# Altium PCB UNReLo End Node PCB.PcbDoc (part 2 of 2)
Units mm, origin at the board's own origin, x right, y up, seen from the top; angles counter-clockwise.
Board outline 54 x 59 mm, 4 copper layers (Top Layer, GND, 3v3 PWR, Bottom Layer), stack 1.586 mm thick; 54 components, 49 nets, 237 pads, 64 vias.
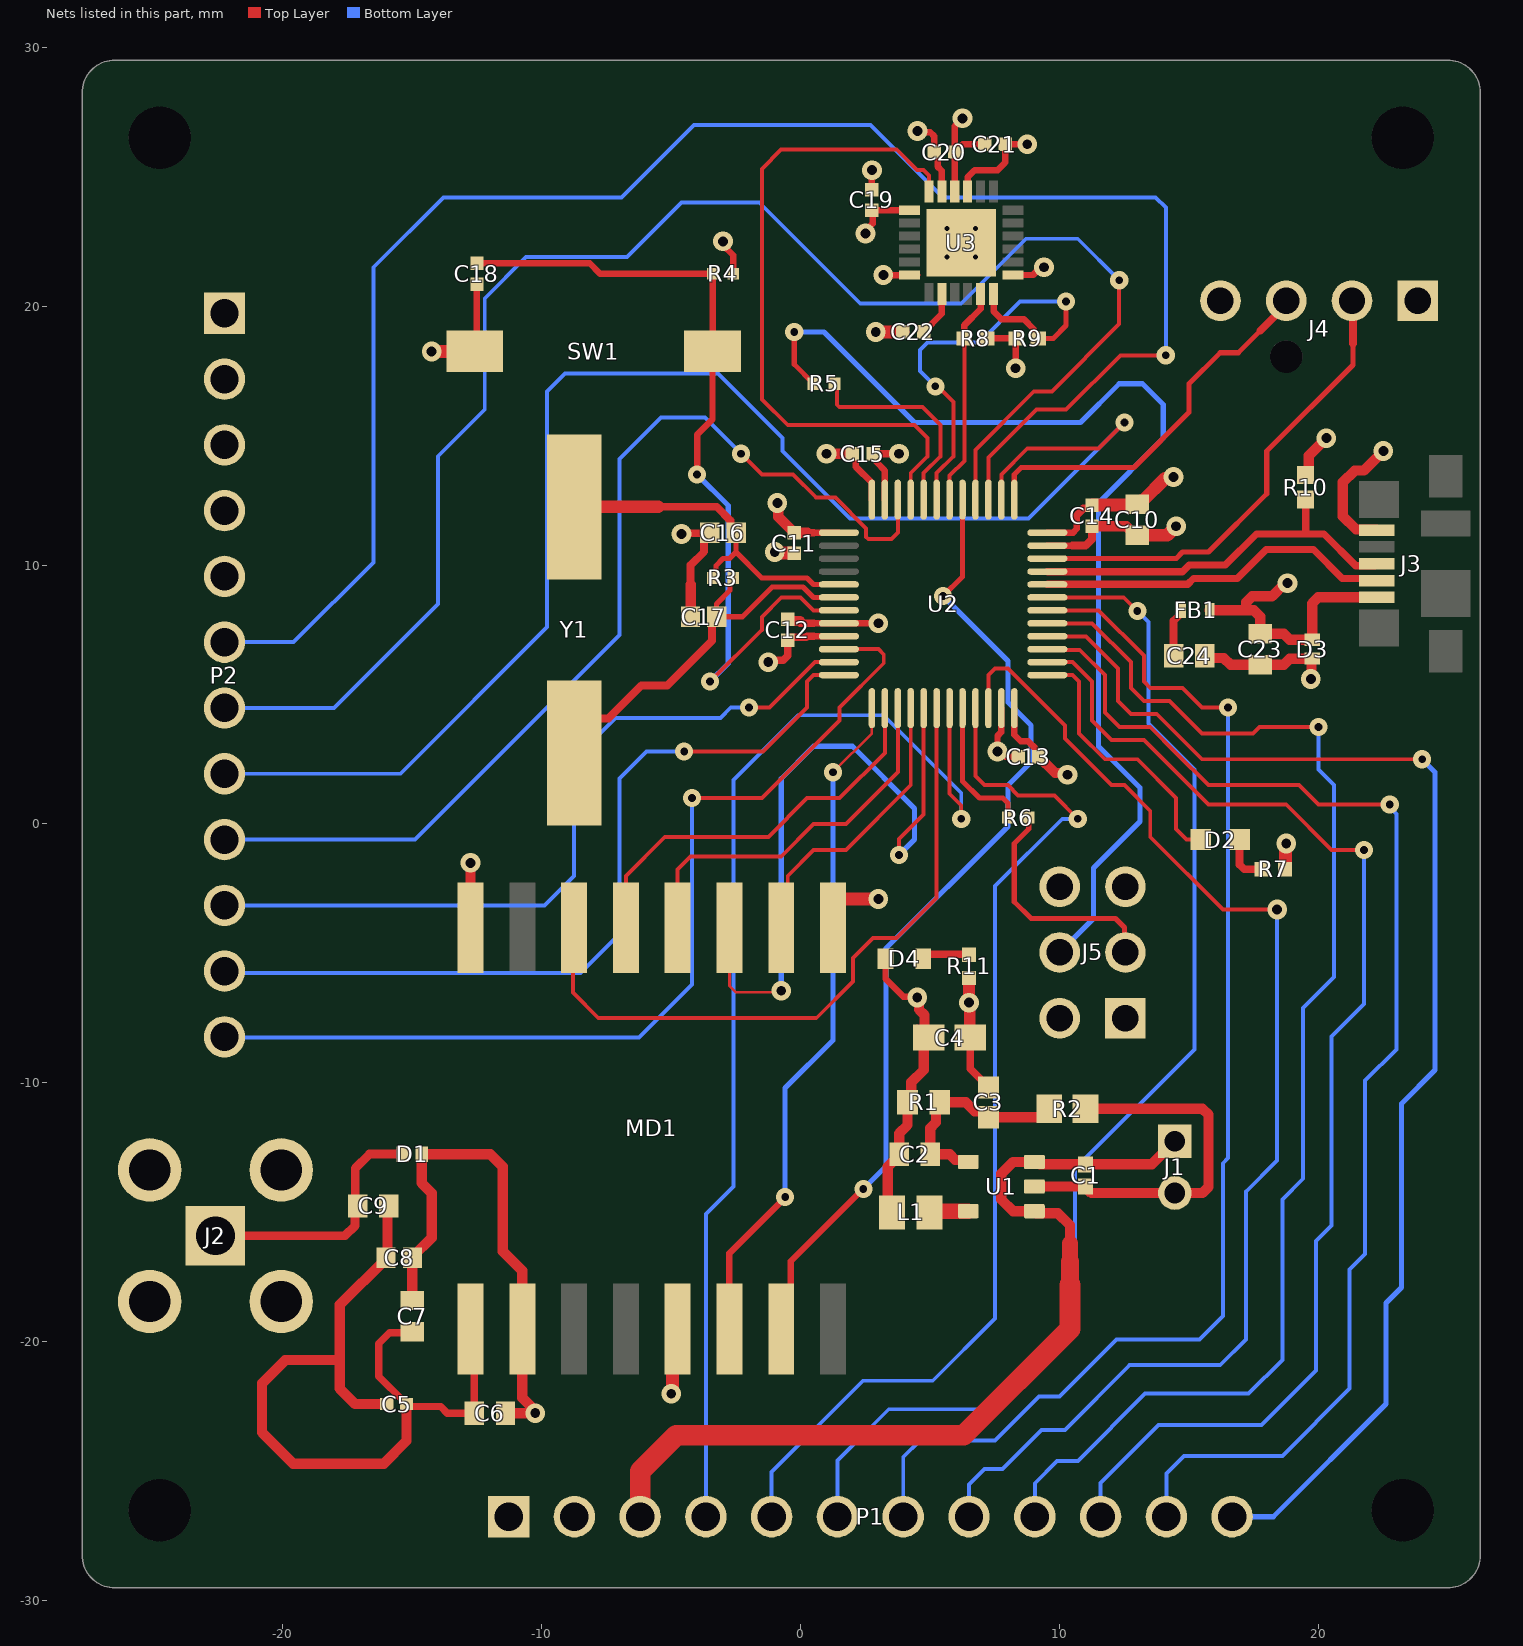
[diagram p4: the nets of this part, all layers, seen from the top]

## Part data (continued)
U2: library part CMP-0237-00250-3, "ARM Cortex-M3 32-bit MCU, 128 KB Flash, 20 KB Internal RAM, 37 I/Os, 48-pin LQFP, -40 to 85 degC, Tray", I/Os (High Current)=37, Manufacturer 1=STMicroelectronics, Operating Frequency(F) (Processor speed) (MHz)=72, Supplier Part Number 1=497-6288-ND, Supply Voltage(Vcc) min (V)=2, A/D Converter="2x12-bit (10 Channel)", ComponentLink1Description="Manufacturer URL", ComponentLink1URL=http://www.st.com/web/en/home.html, ComponentLink2Description=Datasheet, ComponentLink2URL=http://www.st.com/st-web-ui/static/active/en/resource/technical/document/datasheet/CD00161566.pdf, ComponentLink3Description="Package Specification", ComponentLink3URL=http://www.st.com/st-web-ui/static/active/en/resource/technical/document/datasheet/DM00058181.pdf, Core="ARM Cortex-M3", DatasheetVersion="Rev. 16", FLASH Size (Prog) (kB)=128, Internal RAM Size (kB)=20, Manufacturer Part Number 1=STM32F103CBT6, Mounting Technology="Surface Mount", Name=STM32F103CBT6, PackageDescription="48-Pin Low Profile Quad Flat Package, 7 x 7 mm Body, 0.5 mm Pitch", PackageReference=LQFP48, PackageVersion="Rev. 6, 06/2013", Packing=Tray, Supplier 1=Digi-Key, Supplier Unit Price 1=$7.66
U3: library part CMP-1753-00002-2, "3-Axis Gyroscope, Accelerometer and a Digital Motion Processor(TM) (DMP), 2.375 to 3.46 V, -40 to 85 degC, 24-Pin QFN, RoHS, Tape and Reel", Manufacturer 1="TDK InvenSense", Standard Package=5,000, Supplier Part Number 1=1428-1007-1-ND, Category=Sensors,Transducers, Datasheet URL=http://datasheet.octopart.com/MPU-6050-InvenSense-datasheet-14421344.pdf, Datasheet Version="Rev. 3.3, 05/2012", Dynamic Catalog=MPU-6000™Series, Family=Multifunction, Featured Product=MPU-60506-Axis,IntegratedI²CSolution, Manufacturer Part Number 1=MPU-6050, Manufacturer URL=http://www.invensense.com/, Name=MPU-6050, Online Catalog=MPU-6000™Series, Other Names="1428-1007-2 / MPU6050", Output Type=Digital, Sensor Type=MotionTracking, Supplier 1=Digi-Key, Supplier Unit Price 1=$9.11, Unit PriceUSD=Digital
Y1: library part CMP-27762-009874-1, "CRYSTAL 8.0000MHZ 18PF SMD", Case/Package=SMD/SMT, ESR (Equivalent Series Resistance)=80R, Frequency Stability=50ppm, Frequency Tolerance=20ppm, Load Capacitance=18pF, Manufacturer 1="Abracon LLC", Manufacturer Part Number 1=ABLS-8.000MHZ-K4T, Max Operating Temperature=70°C, Min Operating Temperature=-20°C, Operating Frequency="8 MHz", Package Quantity=1000, Supplier Part Number 1=535-9937-1-ND, Accuracy=20ppm, Contact Plating=Tin, Depth=4.7mm, Frequency=8MHz, Height=0.165inch, Lead Free="Lead Free", Length=11.4mm, Mount="Surface Mount", Name=ABLS-8.000MHZ-K4T, Number of Pins=2, Packaging="Tape and Reel", Radiation Hardening=No, REACH SVHC="No SVHC", Series=ABLS, Series Resistance=80R, Supplier 1=Digi-Key, Supplier Unit Price 1=$0.4, Termination=SMD/SMT, Tolerance=20ppm, Width=4.7mm

## Free pads (board coordinates)
  round 2.4 hole 2.4 unplated: B13(-24.75,26.5) B14(-24.75,-26.5)
  round 2.4 hole 2.4: B15(23.25,-26.5) B16(23.25,26.5)

## Via types
v1: diameter 0.762, hole 0.381, Top Layer to Bottom Layer, 35 vias
v2: diameter 0.7, hole 0.3, Top Layer to Bottom Layer, 25 vias
v3: diameter 0.5, hole 0.2, Top Layer to Bottom Layer, 4 vias

## Nets (pads, with @x,y where several pads share a name; then routed paths per layer and width w, separated by ;. In a path a pad name is that pad's centre, name@x,y a point inside that pad or via, vN(x,y) a via of type N, cw(c..) or ccw(c..) an arc to the next point about the centre after c; other vN are vias at no path point)
+3v3: C2.1 C4.1 C10.1 C11.1 C12.1 C13.1 C14.1 C15.1 C19.1 C20.1 C21.1 D4.1 J4.1 J5.1 J5.2 L1.2 MD1.13 P1.1 P2.1 P2.2 R1.2 R4.1 R8.2 R9.2 U2.1 U2.9 U2.24 U2.36 U2.48 U3.10 U3.13 | length 45.1
  Top Layer w0.25: v1(-3,22.5) -3,22.361 -2.6,21.961 R4.1@-2.6,21.25 ; 0.5,7.25 U2.9@1.475,7.25 ; 0.5,11.25 U2.1@1.475,11.25 ; C15.1@2,14.3 2.135,14.165 2.135,13.79 2.75,13.175 U2.48@2.75,12.525 ; v1(2.5,22.8) 2.5,22.908 2.775,23.183 2.775,23.675 C19.1@2.75,23.7 U3.13@4.2,23.7 ; D4.1@3.275,-5.3 3.275,-5.975 3.965,-6.665 4.465,-6.665 v1(4.5,-6.7) ; C4.1@4.5,-7.869 4.881,-8.25 C4.1@4.948,-8.25 ; U3.10@5.95,24.425 C20.1@5.95,25.95 ; v1(6.25,27.25) 5.95,26.95 C20.1@5.95,25.95 ; C21.1@7.1,26.25 6.25,26.25 C20.1@5.95,25.95 ; R8.2@7.175,18.75 R9.2@8.325,18.75 8.313,18.738 8.313,17.612 v1(8.3,17.6) ; U2.24@8.25,4.475 8.25,3.45 8.5,3.2 8.78,3.2 9.065,2.915 9.065,2.735 C13.1@9.2,2.6 ; U2.36@9.525,11.25 10.519,11.25 10.665,11.396 10.665,11.725 10.64,11.75
  Top Layer w0.3: v1(-1.25,6.25) -1.176,6.324 -0.676,6.324 -0.5,6.5 C12.1@-0.5,7.1 ; C12.1@-0.39,7.21 0.21,7.21 0.25,7.25 0.5,7.25 ; 0.25,11.25 0.5,11.25 ; L1.2@3.36,-14.836 L1.2@3.524,-15 ; C2.1@3.535,-13.05 3.575,-13.05 C2.1@3.8,-12.825 ; C4.1@4.75,-8.448 C4.1@4.948,-8.25 ; 10.64,11.75 10.64,11.905 10.925,12.19 11.14,12.19 C14.1@11.25,12.3
  Top Layer w0.4: v1(-0.9,12.4) -0.866,12.366 -0.866,11.866 C11.1@-0.25,11.25 0.25,11.25 ; v1(1,14.3) C15.1@2,14.3 ; L1.2@3.36,-14.836 3.36,-13.234 3.594,-13 3.625,-13 3.8,-12.825 3.8,-11.95 4.125,-11.625 R1.2@4.125,-10.75 4.274,-10.601 4.274,-9.976 4.75,-9.5 C4.1@4.75,-8.448 ; v1(4.5,-6.7) 4.569,-6.769 4.569,-7.165 4.783,-7.378 4.783,-8.084 C4.1@4.948,-8.25 ; C13.1@9.2,2.6 9.831,1.969 10.231,1.969 v1(10.3,1.9) ; J4.1@23.87,20.3 J4.1@24,20.3
  Top Layer w0.5: v1(-5,-22) -4.95,-21.95 -4.95,-19.7 MD1.13@-4.75,-19.5 ; C14.1@11.26,12.31 12.96,12.31 C10.1@13,12.35 13.125,12.475 13.2,12.475 14.075,13.35 14.35,13.35 v1(14.4,13.4)
  Top Layer w0.6: P2.1@-22.26,19.71 P2.1@-22.25,19.72 ; P1.1@-11.28,-26.75 P1.1@-11.231,-26.701
+5V: C1.1 C23.1 D3.2 FB1.1 J1.1 J3.1 P1.3 P2.4 R10.2 U1.1 U1.3 | length 48.5
  Top Layer w0.4: 10.4,-16.2 10.4,-15.5 9.925,-15.025 9.1,-15.025 U1.1@9.025,-14.95 8.2,-14.95 7.75,-14.5 7.75,-13.5 8.2,-13.05 U1.3@9.025,-13.05 9.15,-13.05 9.243,-13.143 C1.1@11,-13.143 13.557,-13.143 J1.1@14.45,-12.25 ; FB1.1@15.8,8.25 17.2,8.25 ; v1(18.8,9.3) 18.702,9.3 18.202,8.8 17.434,8.8 17.2,8.566 17.2,8.25 ; R10.2@19.5,13.475 19.625,13.6 19.625,14.225 v1(20.3,14.9) ; J3.1@22,8.75 19.984,8.75 19.75,8.516 D3.2@19.75,7.115 18.885,7.115 18.65,7.35 C23.1@17.75,7.35 17.75,8 17.5,8.25 17.2,8.25
  Top Layer w0.6: 10.4,-16.9 10.4,-16.2
  Top Layer w0.7: 10.4,-17.8 10.4,-16.9
  Top Layer w0.8: P1.3@-6.2,-26.75 -6.2,-25 -4.8,-23.6 6.3,-23.6 10.4,-19.5 10.4,-17.8
BUCK_FB: C2.2 C3.1 R1.1 R2.2 U1.4 | length 8.5
  Top Layer w0.4: C2.2@5,-12.825 5,-11.75 5.226,-11.524 5.226,-10.899 R1.1@5.375,-10.75 6.375,-10.75 6.723,-11.098 7.044,-11.098 7.25,-11.304 C3.1@7.25,-11.327 9.3,-11.327 9.6,-11.027 R2.2@9.6,-11 ; C2.2@5,-12.75 5.75,-12.75 5.975,-12.975 6.4,-12.975 U1.4@6.475,-13.05
BUCK_SW: L1.1 U1.5 | length 1.5
  Top Layer w0.4: L1.1@4.976,-15 L1.1@5.026,-14.95
  Top Layer w0.6: L1.1@5.026,-14.95 U1.5@6.475,-14.95
GND: C1.2 C3.2 C4.2 C6.2 C7.2 C8.1 C10.2 C11.2 C12.2 C13.2 C14.2 C15.2 C16.1 C17.1 C18.2 C19.2 C20.2 C21.2 C22.2 C23.2 C24.2 D1.1 D3.1 J1.2 J2.2 J2.3 J2.4 J2.5 J3.5 J4.4 J5.5 J5.6 MD1.1 MD1.8 MD1.10 P1.2 P2.3 P2.5 R2.1 R7.1 R11.1 SW1.2 U1.2 U2.8 U2.23 U2.35 U2.47 U3.1 U3.9 U3.11 U3.18 U3.25 | length 92.4
  Top Layer w0.25: SW1.2@-12.5,18.5 C18.2@-12.5,20.85 ; 0.5,7.75 U2.8@1.475,7.75 v1(3,7.75) ; C19.2@2.75,24.5 v1(2.75,25.25) ; C15.2@2.8,14.3 2.935,14.165 2.935,13.965 3.25,13.65 U2.47@3.25,12.525 ; v1@3.1,21.2 3.104,21.196 v1(3.193,21.196) 3.195,21.198 4.198,21.198 U3.18@4.2,21.2 U3.18@4.5,21.2 ; v1(4.508,26.758) 4.553,26.712 5.004,26.712 5.15,26.566 C20.2@5.15,25.95 5.285,25.815 5.285,25.39 5.45,25.225 U3.11@5.45,24.425 ; U3.9@6.45,24.425 6.45,24.985 6.715,25.25 7.604,25.25 7.9,25.546 C21.2@7.9,26.25 v1(8.75,26.25) ; U2.23@7.75,4.475 7.75,3.55 7.6,3.4 v1(7.6,2.8) 7.7,2.8 7.9,2.6 C13.2@8.4,2.6 ; U3.1@8.2,21.2 8.975,21.2 9.275,21.5 v1(9.4,21.5) ; U2.35@9.525,10.75 10.5,10.75
  Top Layer w0.3: v1(-4.6,11.2) -4.575,11.225 C16.1@-3.535,11.225 ; -4.25,9.25 -4.25,10 -3.73,10.52 -3.73,11.03 C16.1@-3.535,11.225 ; C16.1@-3.51,11.25 C16.1@-3.535,11.225 ; 0,7.8 0.05,7.75 0.5,7.75 ; C15.2@2.8,14.3 v1(3.8,14.3) ; C4.2@6.552,-8.25 6.552,-9.452 7.25,-10.15 C3.2@7.25,-10.173 ; 10.5,10.75 11,10.75 11.25,11 C14.2@11.25,11.5
  Top Layer w0.4: C7.2@-15,-18.4 -14.995,-18.395 -14.995,-16.755 C8.1@-14.99,-16.75 -14.99,-16.72 -14.25,-15.98 -14.25,-14.25 -14.635,-13.865 D1.1@-14.635,-12.75 -11.984,-12.75 -11.5,-13.234 -11.5,-16.5 -10.75,-17.25 MD1.10@-10.75,-19.5 -10.75,-22.152 -10.25,-22.652 v1(-10.25,-22.75) C6.2@-11.4,-22.75 C6.2@-11.4,-22.675 ; MD1.8@-12.75,-4 v1(-12.75,-1.5) ; C17.1@-4.26,8 -4.25,8.01 -4.25,9.25 ; C12.2@-0.5,7.9 -0.44,7.84 -0.04,7.84 0,7.8 ; C13.2@8.34,2.66 C13.2@8.4,2.6 ; U1.2@9.025,-14 C1.2@11,-14 11,-14.021 11.229,-14.25 J1.2@14.5,-14.25 ; R2.1@11,-11 15.516,-11 15.75,-11.234 15.75,-14.016 15.516,-14.25 J1.2@14.5,-14.25 ; C14.2@11.25,11.5 12.575,11.5 12.925,11.15 C10.2@13,11.15 ; J1.2@14.45,-14.25 J1.2@14.5,-14.25 ; C24.2@15.6,6.5 15.691,6.409 16.341,6.409 16.6,6.15 C23.2@17.75,6.15 18.65,6.15 18.885,6.385 D3.1@19.75,6.385 19.725,6.36 19.725,5.625 v1(19.7,5.6) ; J3.5@22.25,11.35 22.225,11.375 21.444,11.375 20.939,11.881 20.939,13.194 21.394,13.65 21.75,13.65 v1(22.5,14.4)
  Top Layer w0.45: R11.1@6.5,-5.95 v1(6.5,-6.9) 6.526,-6.926 6.526,-8.224 C4.2@6.552,-8.25
  Top Layer w0.5: P2.5@-22.27,9.58 P2.5@-22.25,9.56 ; P2.3@-22.27,14.62 P2.3@-22.25,14.64 ; v1(-14.25,18.25) SW1.2@-12.595,18.25 ; P1.2@-8.74,-26.75 P1.2@-8.72,-26.73 ; v1(-1,10.5) -0.96,10.46 -0.26,10.46 C11.2@-0.25,10.45 ; MD1.1@1.25,-4 1.25,-3.15 1.5,-2.9 v1(3,-2.9) ; v1(2.9,19) C22.2@3.95,19 ; J5.5@12.54,-2.42 J5.5@12.83,-2.42 ; C10.2@13,11.15 14.15,11.15 v1(14.5,11.5) ; R7.1@18.7,-1.75 18.725,-1.725 18.725,-0.775 v1(18.75,-0.75)
  Bottom Layer w0.5: P1.2@-8.74,-26.75 P1.2@-8.72,-26.73
  other v3: 5.65,21.9 6.75,21.9 5.65,23 6.75,23
IMU_CPOUT: C22.1 U3.20 | length 1.8
  Top Layer w0.25: C22.1@4.75,19 5.45,19.7 U3.20@5.45,20.475
IMU_INT: U2.45 U3.12 | length 26.4
  Top Layer w0.152: U2.45@4.25,12.525 4.25,13.55 4.9,14.2 4.9,14.9 4.4,15.4 -0.5,15.4 -1.5,16.4 -1.5,25.3 -0.76,26.04 3.709,26.04 4.5,25.25 4.75,25.25 4.95,25.05 U3.12@4.95,24.425
IMU_SCL: R8.1 U2.42 U3.23 | length 8.4
  Top Layer w0.152: U2.42@5.75,12.525 5.75,13.45 6.325,14.025 R8.1@6.325,18.75
  Top Layer w0.25: R8.1@6.325,18.75 6.325,19.268 6.95,19.893 6.95,19.915 U3.23@6.95,20.475
IMU_SDA: R9.1 U2.43 U3.24 | length 18.2
  Top Layer w0.152: v2(5.2,16.9) 5.3,16.9 5.9,16.3 5.9,14.2 5.25,13.55 U2.43@5.25,12.525
  Top Layer w0.2: R9.1@9.175,18.75 9.75,18.75 10.25,19.25 v2(10.25,20.174)
  Top Layer w0.25: U3.24@7.45,20.475 7.45,19.8 7.75,19.5 8.61,19.5 9,19.11 9,18.9 9.15,18.75 R9.1@9.175,18.75
  Bottom Layer w0.152: v2(5.2,16.9) 4.6,17.5 4.6,18.3 4.9,18.6 6.9,18.6 8.474,20.174 v2(10.25,20.174)
LED_A: D2.2 U2.25 | length 10.4
  Top Layer w0.152: U2.25@9.525,5.75 10.5,5.75 10.75,5.5 10.75,3.5 11.75,2.5 13,2.5 14.5,1 14.5,-0.2 14.9,-0.6 D2.2@15.45,-0.6
LED_K: D2.1 R7.2 | length 1.9
  Top Layer w0.3: D2.1@16.95,-0.6 16.95,-1.574 17.126,-1.75 R7.2@17.8,-1.75
"LoRa ANT": C5.1 C5.2 C6.1 C7.1 C8.2 C9.1 MD1.9 | length 33.2
  Top Layer w0.284: C5.2@-16,-22.4 C5.2@-15.979,-22.4 ; C5.1@-15.337,-22.284 -16.3,-21.321 -16.3,-20.066 -15.875,-19.641 -15.116,-19.641 C7.1@-15.075,-19.6 ; C5.1@-15.221,-22.4 -15.2,-22.4 -15.106,-22.494 -13.9,-22.494 -13.644,-22.75 C6.1@-12.6,-22.75 -12.6,-19.65 MD1.9@-12.75,-19.5
  Top Layer w0.4: C5.2@-16,-22.4 -17.2,-22.4 -17.8,-21.8 -17.8,-20.7 ; C9.1@-15.9,-14.75 -15.955,-14.805 -15.955,-16.695 C8.2@-16.01,-16.75 -16.01,-16.78 -17.8,-18.57 -17.8,-20.7 ; C5.1@-15.221,-22.4 -15.221,-23.821 -16.1,-24.7 -19.6,-24.7 -20.8,-23.5 -20.8,-21.6 -19.9,-20.7 -17.8,-20.7
MCU_BOOT0: J5.4 R5.2 | length 43.1
  Top Layer w0.2: v2(-0.25,19) -0.25,17.752 0.5,17.002 R5.2@0.5,17
  Bottom Layer w0.2: v2(-0.25,19) 0.9,19 4.4,15.5 10.8,15.5 12.3,17 13.2,17 14,16.2 14,14.9 11.5,12.4 11.5,3 13.1,1.4 13.1,0.1 11.305,-1.695 11.305,-3.655 J5.4@10,-4.96
MCU_BOOT1: J5.3 R6.2 | length 9.1
  Top Layer w0.2: R6.2@8.804,0.25 8.804,-0.196 8.25,-0.75 8.25,-3 8.905,-3.655 12.155,-3.655 12.5,-4 12.5,-4.92 J5.3@12.54,-4.96
MCU_NRST: C18.1 R4.2 SW1.1 U2.7 | length 32.9
  Top Layer w0.152: v2(-3.5,5.5) -1.5,7.5 -1.5,8 -0.75,8.75 0,8.75 0.5,8.25 U2.7@1.475,8.25
  Top Layer w0.2: U2.7@1.465,8.26 U2.7@1.475,8.25
  Top Layer w0.25: C18.1@-12.5,21.65 -8.15,21.65 -7.75,21.25 R4.2@-3.4,21.25 -3.4,18.255 SW1.1@-3.405,18.25 -3.405,15.626 -4,15.031 v2(-4,13.5)
  Bottom Layer w0.2: v2(-4,13.5) -2.8,12.3 -2.8,6.2 v2(-3.5,5.5)
MCU_OSC_IN: C16.2 R3.1 U2.5 Y1.1 | length 13.6
  Top Layer w0.2: R3.1@-3.4,9.5 -3.275,9.625 -3.275,9.975 -3,10.25 -2.75,10.25 -2.5,10.5 ; C16.2@-2.49,11.25 -2.5,11.24 -2.5,10.5 ; U2.5@1.475,9.25 0.49,9.25 0.24,9.5 -1.5,9.5 -2.5,10.5
  Top Layer w0.3: -5.5,12.25 -3.245,12.25 -2.71,11.715 -2.71,11.47 C16.2@-2.49,11.25
  Top Layer w0.5: Y1.1@-8.75,12.25 -5.5,12.25
MCU_OSC_OUT: C17.2 R3.2 U2.6 Y1.2 | length 15.2
  Top Layer w0.2: R3.2@-2.6,9.5 -2.725,9.375 -2.725,9.025 -3.25,8.5 -3.25,8.01 C17.2@-3.24,8 -2.25,8 -1.1,9.15 0.095,9.15 0.495,8.75 U2.6@1.475,8.75
  Top Layer w0.3: Y1.2@-8,2.75 -8,3.924 -7.85,4.074 -7.426,4.074 -6.15,5.35 -5.15,5.35 -3.423,7.077 -3.423,7.817 C17.2@-3.24,8
MCU_PA0: P2.12 U2.10 | length 38.1
  Top Layer w0.152: v2(-4.2,1) -1.5,1 1.5,4 1.5,4.5 3.209,6.209 3.209,6.541 3,6.75 U2.10@1.475,6.75
  Bottom Layer w0.152: P2.12@-22.25,-8.22 -22.22,-8.25 -6.25,-8.25 -4.2,-6.2 v2(-4.2,1)
MCU_PA1: P2.10 U2.11 | length 30.3
  Top Layer w0.152: v2(-2,4.5) -1.203,4.5 0.547,6.25 U2.11@1.475,6.25
  Bottom Layer w0.152: P2.10@-22.25,-3.14 -9.89,-3.14 -8.75,-2 -8.75,2.5 -7.15,4.1 -3.1,4.1 -2.7,4.5 v2(-2,4.5)
MCU_PA2: P2.11 U2.12 | length 32.6
  Top Layer w0.152: v2(-4.5,2.8) -1.45,2.8 0.25,4.5 0.25,5.5 0.5,5.75 U2.12@1.475,5.75
  Bottom Layer w0.152: P2.11@-22.25,-5.68 -22.18,-5.75 -8.5,-5.75 -7,-4.25 -7,1.75 -5.95,2.8 v2(-4.5,2.8)
MCU_PA8: P1.9 U2.29 | length 51.3
  Top Layer w0.152: U2.29@9.525,7.75 11.25,7.75 12.75,6.25 12.75,5.25 13.25,4.75 14.25,4.75 15.5,3.5 17.467,3.5 17.717,3.75 v2(20,3.75)
  Bottom Layer w0.152: P1.9@9.04,-26.75 9.04,-25.46 9.905,-24.595 10.705,-24.595 13.3,-22 17.3,-22 18.6,-20.7 18.6,-14.5 19.4,-13.7 19.4,-7.1 20.6,-5.9 20.6,1.5 20,2.1 v2(20,3.75)
MCU_PA9: P1.7 U2.30 | length 49.6
  Top Layer w0.152: U2.30@9.525,8.25 11.5,8.25 13.25,6.5 13.25,5.5 13.5,5.25 14.75,5.25 15.5,4.5 v2(16.5,4.5)
  Bottom Layer w0.152: P1.7@3.96,-26.75 3.96,-24.44 4.6,-23.8 7.5,-23.8 9.2,-22.1 10,-22.1 12.2,-19.9 15.4,-19.9 16.3,-19 16.3,-13.1 16.5,-12.9 v2(16.5,4.5)
MCU_PA10: P1.6 U2.31 | length 47.6
  Top Layer w0.152: U2.31@9.525,8.75 12.476,8.75 v2(13,8.226)
  Bottom Layer w0.152: P1.6@1.42,-26.75 1.42,-24.58 3.4,-22.6 7.3,-22.6 10.6,-19.3 10.6,-13.3 15.2,-8.7 15.2,2.1 13.426,3.874 13.426,7.8 v2(13,8.226)
MCU_PA15: P2.8 U2.38 | length 57.2
  Top Layer w0.152: U2.38@7.75,12.525 7.75,13.5 8.75,14.5 11.5,14.5 v2(12.5,15.5)
  Top Layer w0.2: U2.38@7.75,12.525 U2.38@7.76,12.535
  Bottom Layer w0.152: P2.8@-22.25,1.94 -15.46,1.94 -9.8,7.6 -9.8,16.7 -9.1,17.4 -3.2,17.4 -0.7,14.9 -0.7,14.4 1.9,11.8 8.8,11.8 v2(12.5,15.5)
MCU_PB1: P1.4 U2.19 | length 45.4
  Top Layer w0.152: U2.19@5.75,4.475 5.75,1.168 6.2,0.718 v2(6.2,0.2)
  Bottom Layer w0.152: P1.4@-3.66,-26.75 -3.66,-15.06 -2.6,-14 -2.6,1.7 -0.1,4.2 3.2,4.2 6.2,1.2 v2(6.2,0.2)
MCU_PB3: P2.6 U2.39 | length 68.4
  Top Layer w0.152: U2.39@7.25,12.525 7.25,14.15 9.1,16 10.25,16 12.35,18.1 v2(14.1,18.1)
  Bottom Layer w0.152: P2.6@-22.25,7.02 -19.58,7.02 -16.5,10.1 -16.5,21.5 -13.8,24.2 -6.925,24.2 -4.125,27 2.7,27 5.5,24.2 13.7,24.2 14.1,23.8 v2(14.1,18.1)
MCU_PB4: P2.7 U2.40 | length 63
  Top Layer w0.152: U2.40@6.75,12.525 6.75,14.45 9,16.7 9.7,16.7 12.3,19.3 v2(12.3,21)
  Bottom Layer w0.152: P2.7@-22.25,4.48 -18.02,4.48 -14,8.5 -14,14.2 -12.2,16 -12.2,20.3 -10.6,21.9 -6.7,21.9 -4.6,24 -1.6,24 2.3,20.1 6.2,20.1 8.7,22.6 10.7,22.6 v2(12.3,21)
MCU_PB9: P2.9 U2.46 | length 40.3
  Top Layer w0.152: v2(-2.3,14.3) -1.5,13.5 -0.3,13.5 0.6,12.6 1.342,12.6 2.526,11.416 2.526,11.089 2.615,11 3.5,11 3.75,11.25 U2.46@3.75,12.525
  Bottom Layer w0.152: P2.9@-22.25,-0.6 -14.9,-0.6 -7,7.3 -7,14.1 -5.4,15.7 -3.7,15.7 v2(-2.3,14.3)
MCU_PB10: P1.5 U2.21 | length 41
  Top Layer w0.152: U2.21@6.75,4.475 6.75,1.85 7.1,1.5 8,1.5 8.4,1.1 9.8,1.1 v2(10.7,0.2)
  Bottom Layer w0.152: P1.5@-1.12,-26.75 -1.12,-25.02 2.4,-21.5 5.1,-21.5 7.5,-19.1 7.5,-2.4 10.1,0.2 v2(10.7,0.2)
MCU_PB11: P1.8 U2.22 | length 48.6
  Top Layer w0.152: U2.22@7.25,4.475 7.25,5.75 7.5,6 8,6 10.2,3.8 10.2,3.3 12,1.5 12.5,1.5 13.5,0.5 13.5,-0.5 16.3,-3.3 v1(18.4,-3.3)
  Bottom Layer w0.152: P1.8@6.5,-26.75 6.5,-25.5 7.1,-24.9 7.8,-24.9 9.3,-23.4 10.2,-23.4 12.7,-20.9 16.2,-20.9 17.2,-19.9 17.2,-14.2 18.4,-13 v1(18.4,-3.3)
MCU_PB13: P1.10 U2.26 | length 48.4
  Top Layer w0.152: U2.26@9.525,6.25 10.5,6.25 11.25,5.5 11.25,4 12,3.25 13.25,3.25 15.75,0.75 18.75,0.75 20.5,-1 v2(21.75,-1)
  Bottom Layer w0.152: P1.10@11.58,-26.75 11.58,-25.44 13.82,-23.2 17.8,-23.2 19.9,-21.1 19.9,-16.1 20.5,-15.5 20.5,-8.2 21.75,-6.95 v2(21.75,-1)
MCU_PB14: P1.11 U2.27 | length 50.5
  Top Layer w0.1: U2.27@9.525,6.75 U2.27@9.551,6.724
  Top Layer w0.152: U2.27@9.551,6.724 10.776,6.724 11.75,5.75 11.75,4.309 12.309,3.75 13.5,3.75 14.5,2.75 15.75,1.5 19.25,1.5 20,0.75 v2(22.75,0.75)
  Bottom Layer w0.152: P1.11@14.397,-26.473 P1.11@14.12,-26.75 14.12,-25.08 14.8,-24.4 18.6,-24.4 21.2,-21.8 21.2,-17.2 21.8,-16.6 21.8,-9.9 23,-8.7 23,0.387 22.75,0.637 v2(22.75,0.75)
MCU_PB15: P1.12 U2.28 | length 50.8
  Top Layer w0.152: U2.28@9.535,7.24 11.01,7.24 12.25,6 12.25,4.75 12.75,4.25 13.75,4.25 15.5,2.5 v2(24,2.5)
  Top Layer w0.2: U2.28@9.525,7.25 U2.28@9.535,7.24
  Bottom Layer w0.2: P1.12@16.66,-26.75 18.25,-26.75 22.6,-22.4 22.6,-18.5 23.2,-17.9 23.2,-10.8 24.5,-9.5 24.5,2 v2(24,2.5)
MCU_SWCLK: J4.3 U2.37 | length 15.1
  Top Layer w0.2: U2.37@8.25,12.525 8.25,13.5 8.519,13.769 12.869,13.769 15,15.9 15,17 16.2,18.2 16.9,18.2 17.75,19.05
  Top Layer w0.3: 17.75,19.05 18.79,20.09 J4.3@18.79,20.3
MCU_SWDIO: J4.2 U2.34 | length 18.4
  Top Layer w0.2: U2.34@9.525,10.25 14.5,10.25 14.75,10.5 15.75,10.5 18,12.75 18,14.4 21.33,17.73 21.33,18.55
  Top Layer w0.3: 21.33,18.55 J4.2@21.33,20.3
NetC24_1: C24.1 FB1.2 | length 1.9
  Top Layer w0.3: C24.1@14.4,6.5 14.4,7.85 14.7,8.15 FB1.2@14.7,8.25
NetR5_1: R5.1 U2.44 | length 8.3
  Top Layer w0.152: R5.1@1.304,17 1.399,16.905 1.399,16.19 1.489,16.101 4.699,16.101 5.4,15.4 5.4,14.2 4.75,13.55 U2.44@4.75,12.525
NetR6_1: R6.1 U2.20 | length 5.5
  Top Layer w0.2: U2.20@6.25,4.475 6.25,1.65 6.9,1 7.8,1 8,0.8 R6.1@8,0.25
PWR_LED_K: D4.2 R11.2 | length 1.9
  Top Layer w0.284: D4.2@4.725,-5.2 4.725,-5.192 4.883,-5.034 6.484,-5.034 R11.2@6.5,-5.05
RF: C9.2 D1.2 J2.1 | length 9.4
  Top Layer w0.345: J2.1@-22.1,-15.9 -17.6,-15.9 -17.208,-15.508 -17.208,-14.858 C9.2@-17.1,-14.75 -17.2,-14.65 -17.2,-13.3 -16.65,-12.75 -15.43,-12.75 D1.2@-15.365,-12.815
RFM_DIO0: MD1.14 U2.13 | length 26.3
  Top Layer w0.1: v2(1.25,2) 2.75,3.5 U2.13@2.75,4.475
  Top Layer w0.25: MD1.14@-2.75,-19.5 -2.75,-16.572 -0.6,-14.422 v2(-0.6,-14.4)
  Bottom Layer w0.2: v2(-0.6,-14.4) -0.6,-10.2 1.25,-8.35 v2(1.25,2)
RFM_DIO1: MD1.15 U2.41 | length 37.8
  Top Layer w0.2: v2(5.5,8.8) 6.25,9.55 U2.41@6.25,12.525
  Top Layer w0.25: MD1.15@-0.75,-19.5 -0.385,-19.135 -0.385,-16.885 2.4,-14.1 v2(2.419,-14.1)
  Bottom Layer w0.2: v2(2.419,-14.1) 3.3,-13.219 3.3,-4.8 8,-0.1 8,1.5 8.9,2.4 8.9,3.8 8,4.7 8,6.3 v2(5.5,8.8)
RFM_MISO: MD1.2 U2.16 | length 11.3
  Top Layer w0.1: MD1.2@-0.75,-4 MD1.2@-0.5,-3.75
  Top Layer w0.152: MD1.2@-0.5,-3.75 -0.5,-2 0.5,-1 1.75,-1 4.25,1.5 U2.16@4.25,4.475
RFM_MOSI: MD1.3 U2.17 | length 27.3
  Top Layer w0.1: MD1.3@-2.75,-4 -2.75,-6.25 -2.5,-6.5 -0.81,-6.5 v1(-0.75,-6.44)
  Top Layer w0.152: v2(3.8,-1.2) 3.8,-0.582 4.75,0.368 U2.17@4.75,4.475
  Bottom Layer w0.2: v1(-0.75,-6.44) -0.75,1.75 0.5,3 2,3 4.4,0.6 4.4,-0.6 v2(3.8,-1.2)
RFM_NSS: MD1.5 U2.14 | length 16
  Top Layer w0.152: MD1.5@-6.75,-4 -6.75,-2 -5.25,-0.5 -1.25,-0.5 0.25,1 1.5,1 3.25,2.75 3.25,3.25 U2.14@3.25,4.475
  Top Layer w0.2: MD1.5@-6.75,-4 MD1.5@-6.5,-3.75
RFM_RST: MD1.6 U2.18 | length 26.8
  Top Layer w0.152: MD1.6@-8.75,-4 -8.8,-4.05 -8.8,-6.5 -7.8,-7.5 0.6,-7.5 2.026,-6.074 2.026,-5.174 2.8,-4.4 3.7,-4.4 5.25,-2.85 U2.18@5.25,4.475
RFM_SCK: MD1.4 U2.15 | length 14.9
  Top Layer w0.152: MD1.4@-4.75,-3.75 -4.75,-1.75 -4.25,-1.25 -0.75,-1.25 0.5,0 1.75,0 3.75,2 U2.15@3.75,4.475
  Top Layer w0.2: MD1.4@-4.75,-4 MD1.4@-4.5,-3.75
USB_D_N: J3.2 U2.32 | length 13.5
  Top Layer w0.284: U2.32@9.525,9.25 9.532,9.257 14.945,9.257 15.17,9.482 16.857,9.482 17.975,10.6 19.8,10.6 20.918,9.482 21.918,9.482 J3.2@22,9.4
USB_D_P: J3.3 R10.1 U2.33 | length 15.2
  Top Layer w0.284: U2.33@9.525,9.75 9.532,9.743 14.743,9.743 15,10 16.4,10 17.6,11.2 19.5,11.2 ; R10.1@19.5,12.543 19.5,11.2 ; J3.3@22.25,10.05 22.168,9.968 21.439,9.968 20.207,11.2 19.5,11.2
pads on no net: J3.4 J3.6 J3.7 J3.8 J3.9 J3.10 J3.11 J4. MD1.7 MD1.11 MD1.12 MD1.16 U2.2 U2.3 U2.4 U3.2 U3.3 U3.4 U3.5 U3.6 U3.7 U3.8 U3.14 U3.15 U3.16 U3.17 U3.19 U3.21 U3.22

## Polygon pours and split planes (outlines as drawn)
GND on GND (split plane): 25.099,28.982 25.215,28.955 25.326,28.909 25.428,28.846 25.519,28.769 25.596,28.678 25.659,28.576 25.705,28.465 25.732,28.349 25.741,28.243 25.74,28.23 25.74,-28.23 25.741,-28.243 25.732,-28.349 25.705,-28.465 25.659,-28.576 25.596,-28.678 25.519,-28.769 25.428,-28.846 25.326,-28.909 25.215,-28.955 25.099,-28.982 24.993,-28.991 24.98,-28.99 -26.48,-28.99 -26.493,-28.991 -26.599,-28.982 -26.715,-28.955 -26.826,-28.909 -26.928,-28.846 -27.019,-28.769 -27.096,-28.678 -27.159,-28.576 -27.205,-28.465 -27.232,-28.349 -27.241,-28.243 -27.24,-28.23 -27.24,28.23 -27.241,28.243 -27.232,28.349 -27.205,28.465 -27.159,28.576 -27.096,28.678 -27.019,28.769 -26.928,28.846 -26.826,28.909 -26.715,28.955 -26.599,28.982 -26.493,28.991 -26.48,28.99 24.98,28.99 24.993,28.991
+3v3 on 3v3 PWR (split plane): 25.099,28.982 25.215,28.955 25.326,28.909 25.428,28.846 25.519,28.769 25.596,28.678 25.659,28.576 25.705,28.465 25.732,28.349 25.741,28.243 25.74,28.23 25.74,-28.23 25.741,-28.243 25.732,-28.349 25.705,-28.465 25.659,-28.576 25.596,-28.678 25.519,-28.769 25.428,-28.846 25.326,-28.909 25.215,-28.955 25.099,-28.982 24.993,-28.991 24.98,-28.99 -26.48,-28.99 -26.493,-28.991 -26.599,-28.982 -26.715,-28.955 -26.826,-28.909 -26.928,-28.846 -27.019,-28.769 -27.096,-28.678 -27.159,-28.576 -27.205,-28.465 -27.232,-28.349 -27.241,-28.243 -27.24,-28.23 -27.24,28.23 -27.241,28.243 -27.232,28.349 -27.205,28.465 -27.159,28.576 -27.096,28.678 -27.019,28.769 -26.928,28.846 -26.826,28.909 -26.715,28.955 -26.599,28.982 -26.493,28.991 -26.48,28.99 24.98,28.99 24.993,28.991
+5V on 3v3 PWR (split plane): 355 vertices, not listed, extent -26.272,-28.073 23.473,15.772

## Other copper
3v3 PWR (plane layer: these items are gaps in the copper):
  lines w0.254: -26.4,11.77 ccw(c-25.13,11.77) -25.13,10.5 -21.9,10.5 cw(c-21.9,8) -19.4,8 -19.4,-7.151 ccw(c-16.651,-7.151) -16.651,-9.9 -12.239,-9.9 cw(c-12.239,-12.439) -9.7,-12.439 -9.7,-26.93 ccw(c-8.43,-26.93) -8.43,-28.2 15.466,-28.2 ccw(c15.466,-20.066) 23.6,-20.066 23.6,14.63 ccw(c22.33,14.63) 22.33,15.9 19.77,15.9 ccw(c19.77,14.63) 18.5,14.63 18.5,11.67 cw(c17.23,11.67) 17.23,10.4 15.97,10.4 ccw(c15.97,9.13) 14.7,9.13 14.7,7.07 ccw(c15.97,7.07) 15.97,5.8 16.53,5.8 cw(c16.53,4.53) 17.8,4.53 17.8,-17.876 cw(c12.176,-17.876) 12.176,-23.5 -6.13,-23.5 cw(c-6.13,-22.23) -7.4,-22.23 -7.4,-9.975 ccw(c-9.475,-9.975) -9.475,-7.9 -14.451,-7.9 cw(c-14.451,-5.251) -17.1,-5.251 -17.1,10.486 ccw(c-20.514,10.486) -20.514,13.9 -24.971,13.9 ccw(c-24.971,12.471) -26.4,12.471 -26.4,11.77

## Silkscreen, mask and mechanical layers (free items; w line width, h text height)
Top Overlay:
  circle w0.254: c-13.9,-3.2 r0.127
  circle w0.254: c-8.8,15.5 r0.127
  circle w0.254: c3.504,25.25 r0.127
  text "C20" at 4.4,27.3 h0.51
  text "C21" at 7.3,27.3 h0.51
  text "SWD" at 14.953,24.453 h1.27
  text "UNReLo Custom End Node / 868MHz" at -20.5,24 h0.76
  text "C19" at 0.3,23.9 h0.51
  text "C18" at -13.2,22.3 h0.51
  text "R4" at -3.4,20.1 h0.51
  text "R9" at 8.5,19.3 h0.51
  text "3V3" at -24.627,18.877 h0.64 r90
  text "R5" at 0.4,18 h0.51
  text "R8" at 6.2,17.5 h0.51
  text "C22" at 3.6,17.3 h0.51
  text "3V3" at -24.627,16.377 h0.64 r90
  text "GND" at 14.877,16.127 h0.64
  text "CLK" at 17.877,16.127 h0.64
  text "DIO" at 20.377,16.127 h0.64
  text "3V3" at 23.127,16.127 h0.64
  text "C15" at 1.7,15.3 h0.51
  text "GND" at -24.627,13.627 h0.64 r90
  text "C10" at 12.5,13.2 h0.46
  text "C14" at 10.7,12.9 h0.46
  text "R10" at 17.4,12.6 h0.51
  text "C17" at -3.7,11.9 h0.46
  text "C11" at -0.4,11.7 h0.46
  text "5V" at -24.627,11.627 h0.64 r90
  text "R3" at -3.5,9.9 h0.46
  text "FB1" at 14.6,9.3 h0.51
  text "GND" at -24.627,8.877 h0.64 r90
  text "C12" at -1.2,8.4 h0.46
  text "D3" at 19.3,7.8 h0.51
  text "Y1" at -9.1,7.5 h0.46
  text "C17" at -4.4,6.7 h0.46
  text "B3" at -24.627,6.627 h0.64 r90
  text "C23" at 17,4.7 h0.51
  text "C24" at 14.2,4.6 h0.51
  text "B14" at -24.627,4.127 h0.64 r90
  text "C13" at 9.7,2.4 h0.46
  text "A15" at -24.627,1.127 h0.64 r90
  text "D2" at 15.7,0.7 h0.51
  text "R6" at 9.3,-0.1 h0.46
  text "B9" at -24.627,-1.123 h0.64 r90
  text "R7" at 19.4,-2.1 h0.51
  text "GND" at 14.873,-2.873 h0.51 r90
  text "A1" at -24.627,-3.373 h0.64 r90
  text "R11" at 5.9,-4.4 h0.51
  text "PWR" at 3.3,-4.7 h0.46
  text "A2" at -24.627,-6.073 h0.64 r90
  text "BOOT0" at 8.123,-6.123 h0.51 r90
  text "BOOT1" at 14.873,-6.123 h0.51 r90
  text "3V3" at 14.873,-8.473 h0.51 r90
  text "C4" at 2.9,-8.6 h0.51
  text "A0" at -24.627,-8.623 h0.64 r90
  text "C3" at 8.3,-9.3 h0.51 r90
  text "R2" at 9.9,-10.1 h0.51
  text "R1" at 2.6,-11 h0.51
  text "D1" at -15.3,-11.8 h0.51
  text "C2" at 2.6,-12.8 h0.33
  text "C9" at -17.1,-13.6 h0.51
  text "C1" at 10.5,-15.5 h0.51
  text "C8" at -15.2,-16.1 h0.51
  text "U1" at 7.2,-16.7 h0.51
  text "L1" at 3.9,-17.2 h0.51
  text "VBATT" at 12.953,-18.547 h1.27
  text "C7" at -15.5,-21.2 h0.51
  text "C6" at -9.2,-23.2 h0.46
  text "C5" at -16.2,-24.3 h0.51
  text "3V3" at -12.073,-24.873 h0.64
  text "GND" at -9.373,-24.873 h0.64
  text "5V" at -6.373,-24.873 h0.64
  text "B1" at -3.873,-24.873 h0.64
  text "B10" at -1.623,-24.873 h0.64
  text "A10" at 0.877,-24.873 h0.64
  text "A9" at 3.627,-24.873 h0.64
  text "B11" at 5.877,-24.873 h0.64
  text "A8" at 8.877,-24.873 h0.64
  text "B13" at 11.127,-24.873 h0.64
  text "B14" at 13.627,-24.873 h0.64
  text "B15" at 16.127,-24.873 h0.64
Mechanical 1:
  lines w0.254: -9.98,-29.5 24.98,-29.5 ccw(c24.98,-28.23) 26.25,-28.23 26.25,28.23 ccw(c24.98,28.23) 24.98,29.5 -26.5,29.5 ccw(c-26.5,28.25) -27.75,28.25 -27.75,-28.23 ccw(c-26.48,-28.23) -26.48,-29.5 -9.75,-29.5

## Text inside footprints (layer, text, board x,y; h text height)
P1: Top Overlay "1" at -13.5,-27.25 h1.02; Top Overlay "12" at 18.75,-27 h1.02
P2: Top Overlay "1" at -22.5,21.75 h1.02; Top Overlay "12" at -23.25,-11.25 h1.02